# EAGLE board attiny85 (EAGLE 9.6.2)
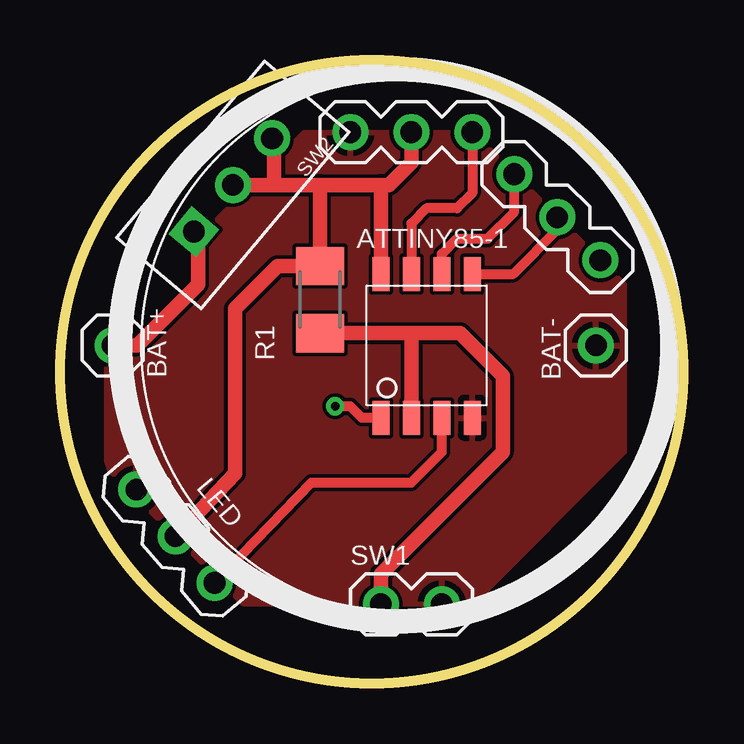
[diagram p0: board, top side]
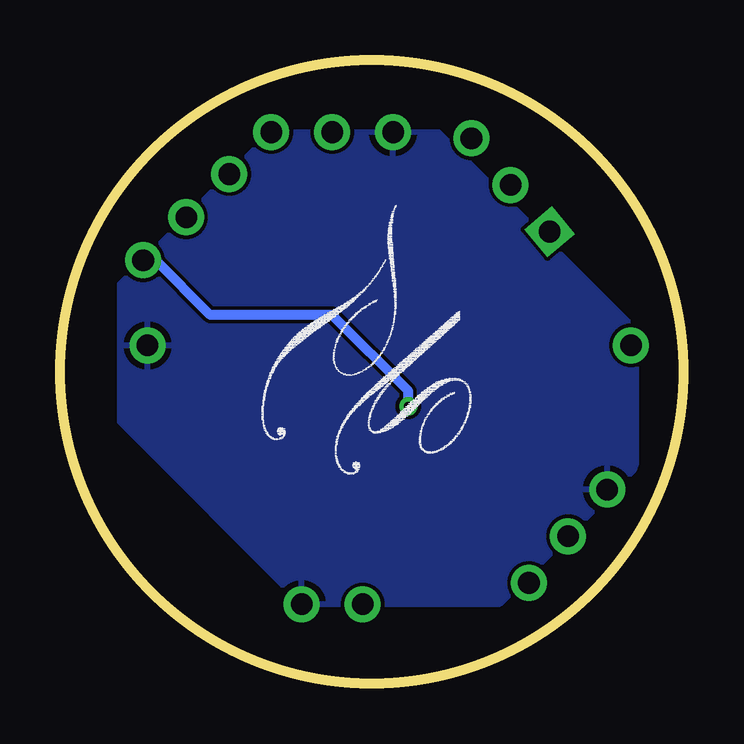
[diagram p1: board, bottom side, seen from below]

Size 26 x 26 mm. Coordinates in mm from the lower left corner, seen from the top.
Outline: circle at 13,13 radius 13
Copper layers (1*16): Top 0.035mm / dielectric 1.5mm / Bottom 0.035mm
Design rules "default": minimum track width 6mil, minimum drill 0.35mm, track to track 6mil, track to pad 6mil, pad to pad 6mil, via to via 6mil, smd to smd 6mil, copper to edge 40mil, drill to drill 6mil, minimum pad ring 10mil, minimum via ring 8mil, stop-mask expansion 4mil, vias tented up to drill 0mil, thermal gap 10mil

## Footprints (pad centres in the part's own frame; a part is rotated, then mirrored left to right if it is on the bottom)
ATTINY85-20SUR = smd 1.422 x 0.711: P1 -3.02,1.905; P2 -3.02,0.635; P3 -3.02,-0.635; P4 -3.02,-1.905; P5 2.98,-1.905; P6 2.98,-0.635; P7 2.98,0.635; P8 2.98,1.905
PINHEAD-MA01-1 = drill 0.9 pad 1.5: 1 1.27,0
PINHEAD-MA03-1 = drill 0.9 pad 1.5: 1 -1.27,0; 2 1.27,0; 3 3.81,0
M3216 = smd 1.6 x 2: 1 -1.4,0; 2 1.4,0
PINHEAD-MA02-1 = drill 0.9 pad 1.5: 1 -1.27,0; 2 1.27,0
SW3-1 = drill 0.9 pad 1.5 square: 1 -1.27,0 | drill 0.9 pad 1.5: 2 1.27,0; 3 3.81,0

## Placement (x,y rotation side)
ATTINY85-1  [ATTINY85-20SUR]  15.29,14.1 90 top
BAT+  [PINHEAD-MA01-1]  0.92,14.1 0 top
BAT-  [PINHEAD-MA01-1]  21.08,14.1 0 top
LED  [PINHEAD-MA03-1]  4,7.11 310 top
LOGO1  [LOGO-YT2-BOTTOM]  12.74,13.46 90 top
R1  10K  [M3216]  10.84,16 90 top
SV1  [PINHEAD-MA03-1]  21.64,18.55 135 top
SV2  [PINHEAD-MA03-1]  15.92,22.99 180 top
SW1  [PINHEAD-MA02-1]  14.65,3.3 180 top
SW2  [SW3-1]  6.39,19.81 50 top

## Library data of the parts
ATTINY85-1 BAT+ BAT- LOGO1 SW1 = ytani1
LED SV1 SV2 = ytani1; OC_FARNELL: unknown; OC_NEWARK: unknown
R1 = rcl; SPICEPREFIX: R
SW2 = ytani1; MF: HiLetgo; URL_AMAZON: https://www.amazon.co.jp/gp/product/B01LYVYQNO/

## Nets
+3V3: BAT+.1 SW2.1
BAT+: ATTINY85-1.P8 LED.2 R1.2 SV2.2 SW2.2 SW2.3
GND: ATTINY85-1.P4 BAT-.1 LED.1 SV2.3 SW1.1
N$1: ATTINY85-1.P3 LED.3
N$2: ATTINY85-1.P7 SV2.1
N$3: ATTINY85-1.P6 SV1.3
N$4: ATTINY85-1.P1 SV1.1
N$5: ATTINY85-1.P5 SV1.2
PB3: ATTINY85-1.P2 R1.1 SW1.2

## Tracks (layer width: path | path; a pad name or v marks a point on that pad's centre or on a via)
+3V3
  Top 0.61: SW2.1 5.76,18.66 5.76,16.64 3.22,14.1 BAT+.1
BAT+
  Top 0.406: 13.38,17.27 ATTINY85-1.P8
  Top 0.61: LED.2 7.29,8.75 7.29,15.63 9.06,17.41 R1.2 10.84,20.79 | SV2.2 14.65,21.72 13.72,20.79 13.38,20.79 | SW2.2 8.94,20.79 | 8.94,20.79 10.84,20.79 | 10.84,20.79 13.38,20.79 | SW2.3 8.94,22.64 8.94,20.79 | 13.38,20.79 13.38,17.27
GND
  pour Top: 1.95,9.02 1.95,14.73 10.21,22.99 17.19,22.99 23.54,16.64 23.54,9.65 17.19,3.3 7.66,3.3
  pour Bottom: 1.95,9.02 1.95,14.73 10.21,22.99 17.19,22.99 23.54,16.64 23.54,10.93 15.92,3.3 7.66,3.3
N$1
  Top 0.406: LED.3 10.49,8.38 14.65,8.38 15.92,9.65 ATTINY85-1.P3
N$2
  Top 0.406: SV2.1 17.19,20.45 16.55,19.81 15.29,19.81 14.65,19.18 ATTINY85-1.P7
N$3
  Top 0.406: ATTINY85-1.P6 15.92,17.91 16.55,18.55 17.82,18.55 18.94,19.66 SV1.3
N$4  (via drill 0.35)
  Top 0.406: ATTINY85-1.P1 12.59,11.08 12.11,11.56 v11.47,11.56
  Bottom 0.406: v11.47,11.56 11.47,12.2 14.65,15.37 19.73,15.37 22.01,17.65 SV1.1
N$5
  Top 0.406: SV1.2 20.74,18.92 18.9,17.08 ATTINY85-1.P5
PB3
  Top 0.61: R1.1 14.65,14.61 | 14.65,14.61 16.68,14.61 18.46,12.83 18.46,9.65 13.38,4.57 SW1.2 | 14.65,14.61 ATTINY85-1.P2